# EAGLE board powerboard_v1a (EAGLE 7.2.0)
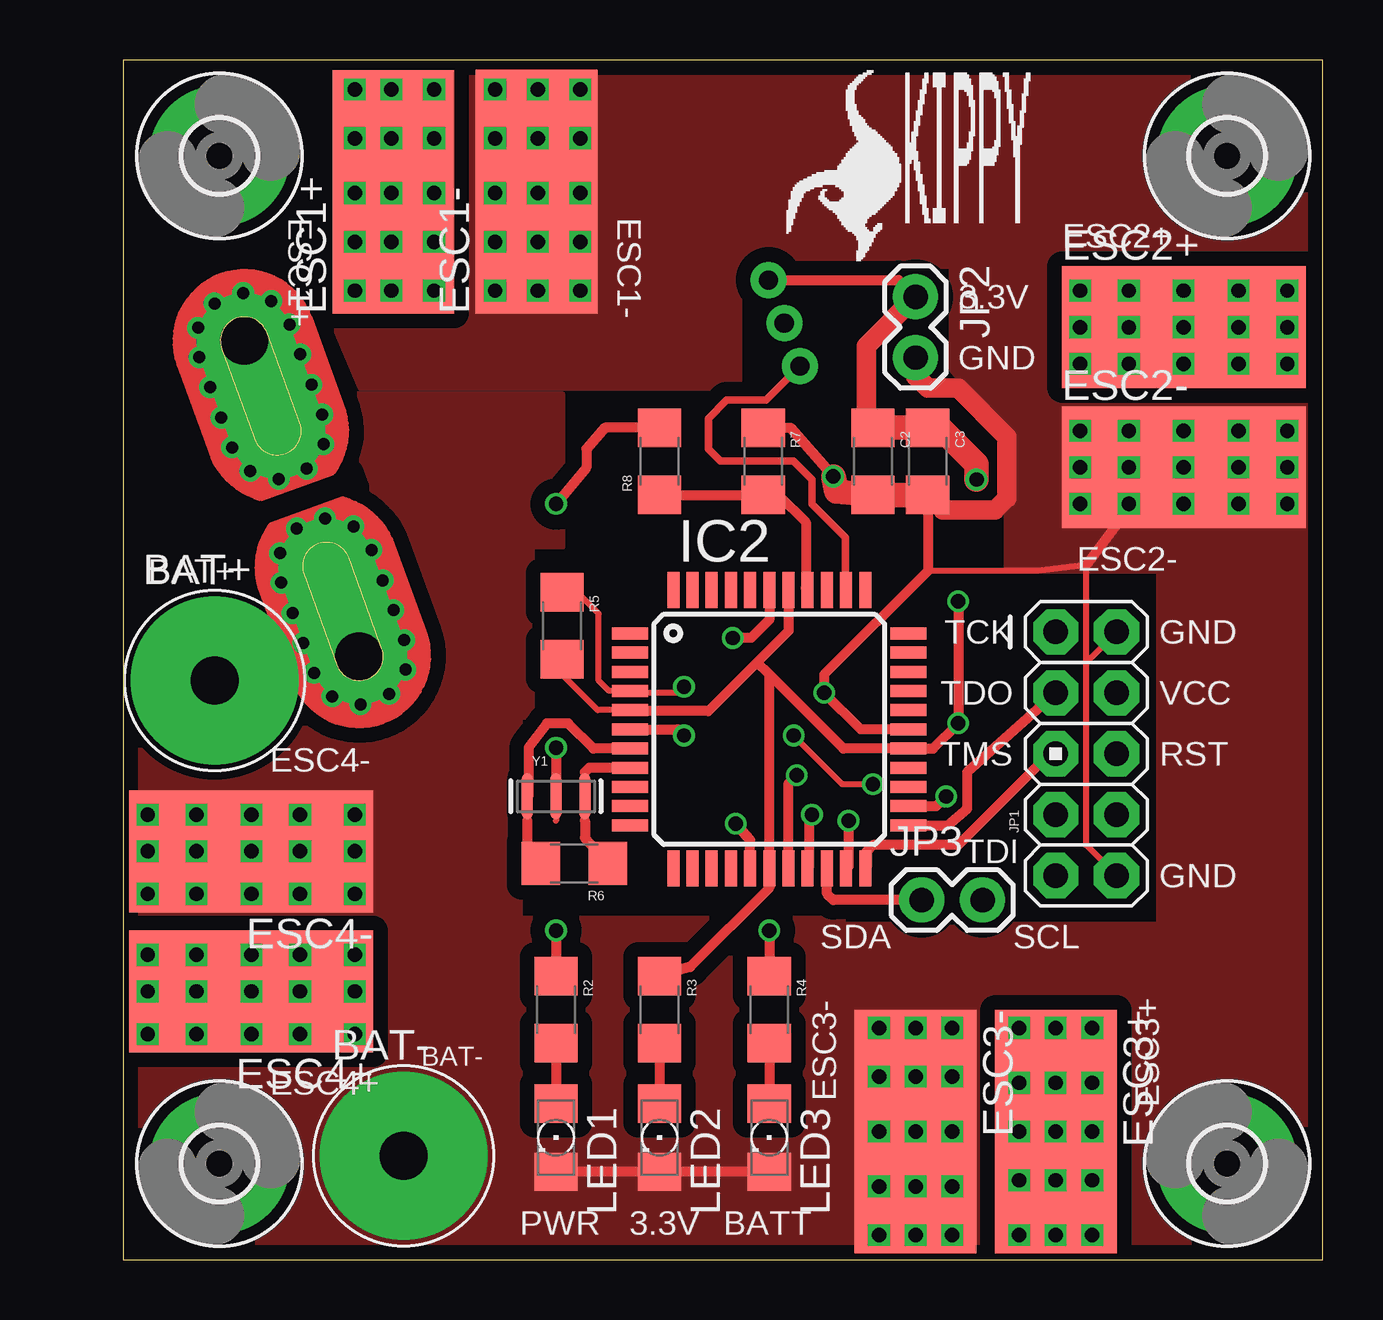
[diagram p0: board, top side]
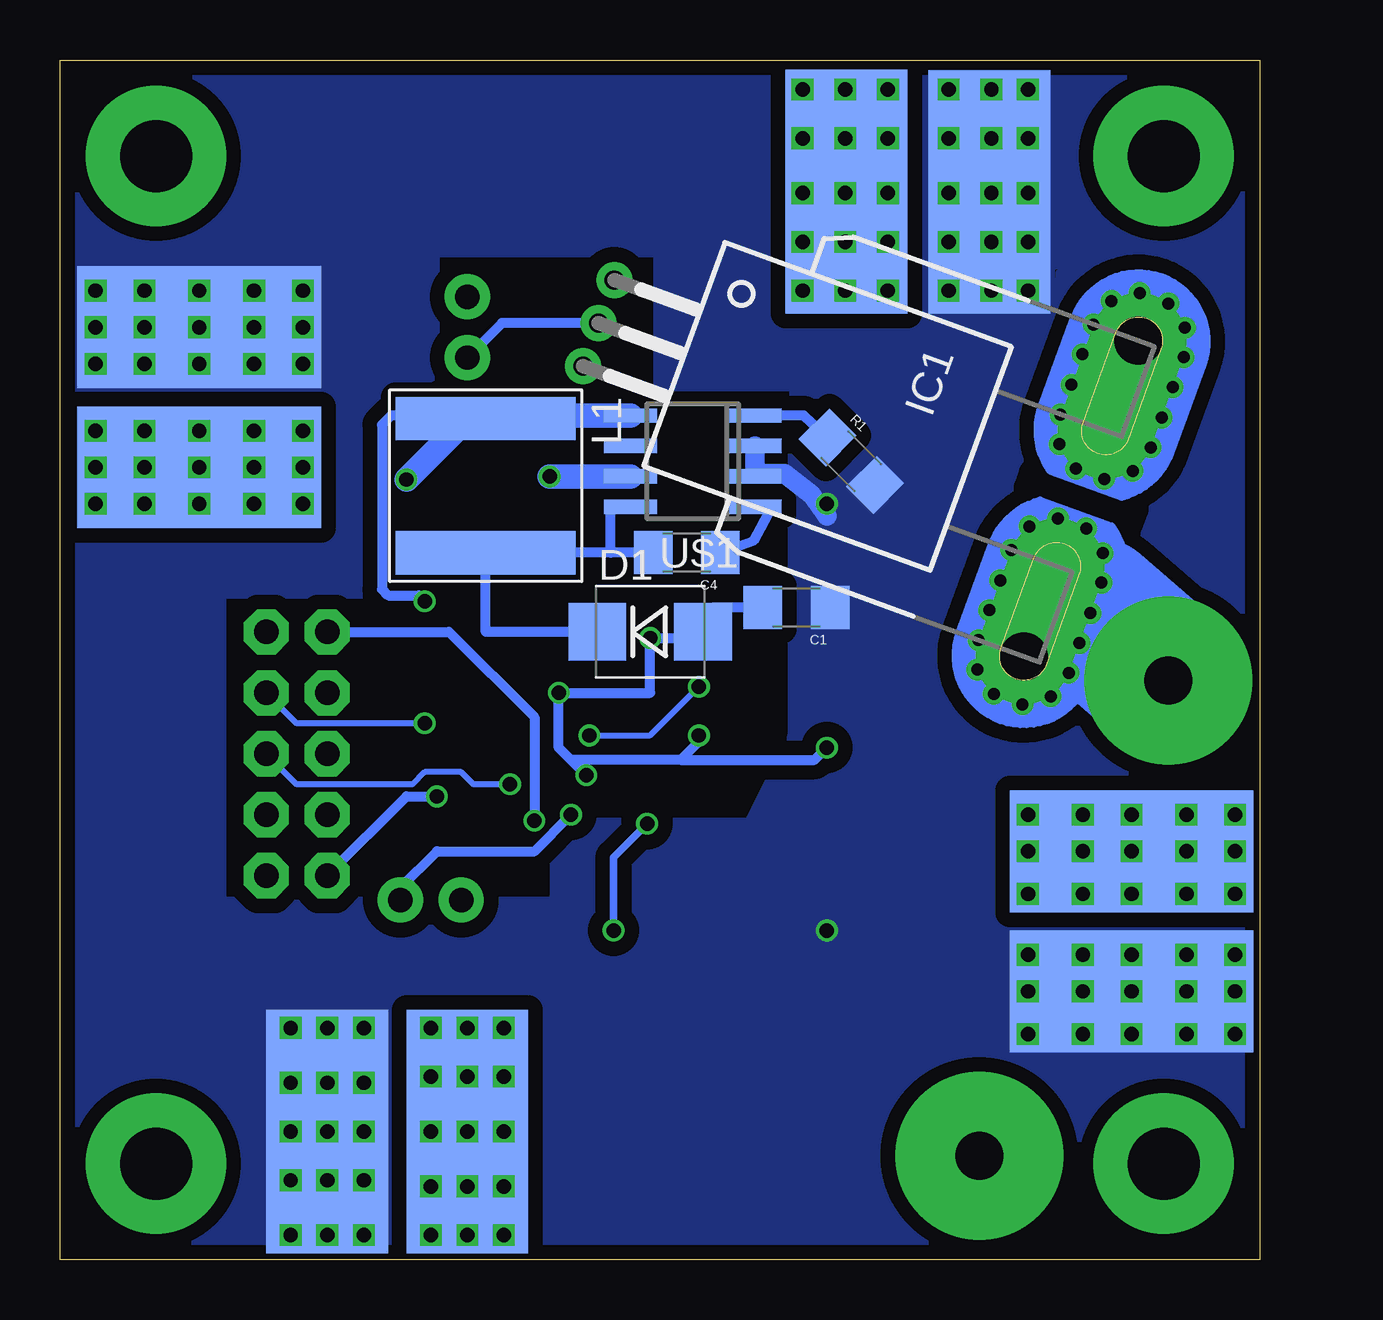
[diagram p1: board, bottom side, seen from below]

Size 50 x 50 mm. Coordinates in mm from the lower left corner, seen from the top.
Outline: 0,0 50,0 50,50 0,50 0,0
Copper layers (1*2*15*16): Top 0.035mm / dielectric 0.2mm / layer 2 0.0175mm / dielectric 1.1mm / layer 15 0.0175mm / dielectric 0.2mm / Bottom 0.035mm
Design rules "SeeedStudio_DRU_no_angle_20130527": minimum track width 6mil, minimum drill 12mil, track to track 6mil, track to pad 6mil, pad to pad 6mil, via to via 6mil, smd to smd 0mil, copper to edge 10mil, drill to drill 10mil, minimum pad ring 6mil, minimum via ring 6mil, stop-mask expansion 2mil, vias tented up to drill 25mil, thermal gap 10mil

## Footprints (pad centres in the part's own frame; a part is rotated, then mirrored left to right if it is on the bottom)
5/2 = drill 2 pad 7: P$1 0,0
1206 = smd 1.6 x 1.8: 1 -1.4,0; 2 1.4,0
SMB-DIODE = smd 2.4 x 2.4: A 2.2,0; C -2.2,0
SMD5.08-10.16 = smd 5.08 x 10.16 bottom: P$1 0,0 | smd 5.08 x 10.16: P$2 0,0
3,0-PAD = drill 3 pad 5.842: B3,0 0,0
CB-PFF = drill 0.8 pad 1.5: 1 -1.91,-21.4; 2 0,-21.4; 3 1.91,-21.4 | drill 2 pad 4 offset: IP+ 7,0; IP- -7,0 | drill 0.5 pad 0.9: IP+@2 8.89,0.635; IP+@3 8.89,-0.635; IP+@4 8.175,-1.625; IP+@5 7,-2; IP+@6 5.675,-2; IP+@7 4.35,-2; IP+@8 3,-2; IP+@9 1.825,-1.625; IP+@10 1.1,-0.625; IP+@11 1.1,0.625; IP+@12 1.825,1.625; IP+@13 3,2; IP+@14 4.35,2; IP+@15 5.675,2; IP+@16 7,2; IP+@17 8.175,1.625; IP-@2 -8.89,0.635; IP-@3 -8.89,-0.635; IP-@4 -8.175,-1.625; IP-@5 -7,-2; IP-@6 -5.675,-2; IP-@7 -4.325,-2; IP-@8 -3,-2; IP-@9 -1.825,-1.625; IP-@10 -1.1,-0.625; IP-@11 -1.1,0.625; IP-@12 -1.825,1.625; IP-@13 -3,2; IP-@14 -4.325,2; IP-@15 -5.675,2; IP-@16 -7,2; IP-@17 -8.175,1.625
TQFP44 = smd 1.5 x 0.5: 1 -5.8,4; 2 -5.8,3.2; 3 -5.8,2.4; 4 -5.8,1.6; 5 -5.8,0.8; 6 -5.8,0; 7 -5.8,-0.8; 8 -5.8,-1.6; 9 -5.8,-2.4; 10 -5.8,-3.2; 11 -5.8,-4; 23 5.8,-4; 24 5.8,-3.2; 25 5.8,-2.4; 26 5.8,-1.6; 27 5.8,-0.8; 28 5.8,0; 29 5.8,0.8; 30 5.8,1.6; 31 5.8,2.4; 32 5.8,3.2; 33 5.8,4 | smd 0.5 x 1.5: 12 -4,-5.8; 13 -3.2,-5.8; 14 -2.4,-5.8; 15 -1.6,-5.8; 16 -0.8,-5.8; 17 0,-5.8; 18 0.8,-5.8; 19 1.6,-5.8; 20 2.4,-5.8; 21 3.2,-5.8; 22 4,-5.8; 34 4,5.8; 35 3.2,5.8; 36 2.4,5.8; 37 1.6,5.8; 38 0.8,5.8; 39 0,5.8; 40 -0.8,5.8; 41 -1.6,5.8; 42 -2.4,5.8; 43 -3.2,5.8; 44 -4,5.8
AVR_ICSP = drill 1.016 pad 1.88 octagon: 1 -1.27,5.08; 2 1.27,5.08; 3 -1.27,2.54; 4 1.27,2.54; 5 -1.27,0; 6 1.27,0; 7 -1.27,-2.54; 8 1.27,-2.54; 9 -1.27,-5.08; 10 1.27,-5.08
1X02 = drill 1.016 pad 1.88: 1 0,0; 2 2.54,0
NRS8030 = smd 1.8 x 7.5: P$1 2.8,0; P$2 -2.8,0
LED_1206 = smd 1.6 x 1.803: A -1.422,0; C 1.422,0
SO8 = smd 0.6 x 2.2: 1 -1.905,-2.6; 2 -0.635,-2.6; 3 0.635,-2.6; 4 1.905,-2.6; 5 1.905,2.6; 6 0.635,2.6; 7 -0.635,2.6; 8 -1.905,2.6
RESONATOR-SMD = smd 0.45 x 1.905: 1 -1.2,0; 2 0,0; 3 1.2,0

## Placement (x,y rotation side)
BAT+  5/2  [5/2]  3.81,24.13 0 top
BAT-  5/2  [5/2]  11.68,4.32 0 top
C1  10µ  [1206]  19.3,27.18 180 bottom
C2  22µ/16V  [1206]  31.24,33.27 270 top
C3  22µ/16V  [1206]  33.53,33.27 270 top
C4  0.1µ  [1206]  23.88,29.46 180 bottom
D1  B330B  [SMB-DIODE]  25.4,26.16 0 bottom
ESC1+  SMD10  [SMD5.08-10.16]  11.25,44.5 0 top
ESC1-  SMD10  [SMD5.08-10.16]  17.23,44.5 0 top
ESC2+  SMD10  [SMD5.08-10.16]  44.2,38.86 270 top
ESC2-  SMD10  [SMD5.08-10.16]  44.2,33.02 270 top
ESC3+  SMD10  [SMD5.08-10.16]  38.86,5.33 180 top
ESC3-  SMD10  [SMD5.08-10.16]  33.02,5.33 180 top
ESC4+  SMD10  [SMD5.08-10.16]  5.33,11.18 90 top
ESC4-  SMD10  [SMD5.08-10.16]  5.33,17.02 90 top
H1  MOUNT-PAD-ROUND3.0  [3,0-PAD]  4,46 0 top
H2  MOUNT-PAD-ROUND3.0  [3,0-PAD]  46,46 0 top
H3  MOUNT-PAD-ROUND3.0  [3,0-PAD]  4,4 0 top
H4  MOUNT-PAD-ROUND3.0  [3,0-PAD]  46,4 90 top
IC1  ACS756LCB-100B-PFF-T  [CB-PFF]  7.44,31.71 250 bottom
IC2  ATMEGA644-A  [TQFP44]  26.92,22.1 0 top
JP1  JTAG_CONNPTH  [AVR_ICSP]  40.13,21.08 0 top
JP2  M02PTH  [1X02]  33.02,40.13 270 top
JP3  M02PTH  [1X02]  33.27,14.99 0 top
L1  NRS8030T100  [NRS8030]  32.26,32.26 270 bottom
LED1  RED  [LED_1206]  18.03,5.08 270 top
LED2  RED  [LED_1206]  22.35,5.08 270 top
LED3  RED  [LED_1206]  26.92,5.08 270 top
R1  100k  [1206]  17.02,33.27 315 bottom
R2  100k  [1206]  18.03,10.41 270 top
R3  100k  [1206]  22.35,10.41 270 top
R4  100k  [1206]  26.92,10.41 270 top
R5  10k  [1206]  18.29,26.42 270 top
R6  1M  [1206]  18.8,16.51 180 top
R7  10k  [1206]  26.67,33.27 270 top
R8  50k  [1206]  22.35,33.27 90 top
U$1  AD2302ARDZ-3.3  [SO8]  23.62,33.27 90 bottom
U$2  SKIPPYTXT-PLC-10MM  [SKIPPYTXT-PLC-10MM]  27.69,41.66 0 top
Y1  10MHZ  [RESONATOR-SMD]  18.03,19.3 0 top

## Library data of the parts
BAT+ BAT- ESC1+ ESC1- ESC2+ ESC2- ESC3+ ESC3- ESC4+ ESC4- JP1 = connectors
C1-C4 = SparkFun-Capacitors
D1 = SparkFun-DiscreteSemi; PROD_ID: DIO-09646
H1-H4 = holes
IC1 = allegro; MPN: ACS758LCB-100B-PFF-T; OC_FARNELL: 1718998; OC_NEWARK: 04R7132
IC2 = atmega; OC_FARNELL: unknown; OC_NEWARK: unknown
JP2 JP3 = SparkFun-Connectors
L1 = inductors
LED1-LED3 = eagle-ltspice; SPICEMODEL: NONE; SPICEPREFIX: D; SPICETYPE: diode
R1-R8 = SparkFun-Passives
U$1 = dcdcconv
U$2 = skippy-logo
Y1 = SparkFun-FreqCtrl; PROD_ID: XTAL-08895

## Nets
3.3V: C2.1 C3.1 IC1.1 IC2.5 IC2.17 IC2.27 IC2.38 JP1.4 JP2.1 L1.P$2 R3.1 R5.2 U$1.5
GND: BAT-.P$1 C1.2 C2.2 C3.2 D1.A ESC1-.P$1 ESC1-.P$2 ESC2-.P$1 ESC2-.P$2 ESC3-.P$1 ESC3-.P$2 ESC4-.P$1 ESC4-.P$2 IC1.2 IC2.6 IC2.18 IC2.28 IC2.39 JP1.2 JP1.10 JP2.2 LED1.C LED2.C LED3.C R7.1 U$1.7 Y1.2
I_VOUT: IC1.3 IC2.35
LO_BATT_LED: IC2.16 R4.1
N$1: BAT+.P$1 IC1.IP+ IC1.IP+@2 IC1.IP+@3 IC1.IP+@4 IC1.IP+@5 IC1.IP+@6 IC1.IP+@7 IC1.IP+@8 IC1.IP+@9 IC1.IP+@10 IC1.IP+@11 IC1.IP+@12 IC1.IP+@13 IC1.IP+@14 IC1.IP+@15 IC1.IP+@16 IC1.IP+@17
N$2: C4.2 D1.C L1.P$1 U$1.8
N$3: R1.1 U$1.4
N$4: LED1.A R2.2
N$5: C4.1 U$1.1
N$6: LED2.A R3.2
N$7: LED3.A R4.2
N$8: IC2.7 R6.2 Y1.1
N$9: IC2.8 R6.1 Y1.3
N$10: IC2.37 R7.2 R8.1
NSRST: IC2.4 JP1.6 R5.1
SCL: IC2.19 JP3.2
SDA: IC2.20 JP3.1
TCK: IC2.21 JP1.1
TDI: IC2.24 JP1.9
TDO: IC2.23 JP1.3
TMS: IC2.22 JP1.5
V_BATT: C1.1 ESC1+.P$1 ESC1+.P$2 ESC2+.P$1 ESC2+.P$2 ESC3+.P$1 ESC3+.P$2 ESC4+.P$1 ESC4+.P$2 IC1.IP- IC1.IP-@2 IC1.IP-@3 IC1.IP-@4 IC1.IP-@5 IC1.IP-@6 IC1.IP-@7 IC1.IP-@8 IC1.IP-@9 IC1.IP-@10 IC1.IP-@11 IC1.IP-@12 IC1.IP-@13 IC1.IP-@14 IC1.IP-@15 IC1.IP-@16 IC1.IP-@17 R1.2 R2.1 R8.2 U$1.2 U$1.3

## Tracks (layer width: path | path; a pad name or v marks a point on that pad's centre or on a via)
3.3V  (via drill 0.6)
  Top 0.254: IC2.5 19.77,22.9 18.29,24.38 R5.2
  Top 0.406: IC2.38 27.72,26.2 26.42,24.89 | 26.42,24.89 24.38,22.86 21.16,22.86 IC2.5 | 26.92,24.38 30.01,21.3 IC2.27 33.74,21.3 v34.8,22.35 v34.8,27.43 | 26.92,24.38 26.42,24.89 | 26.92,24.38 IC2.17 26.92,15.49 23.62,12.19 R3.1 | 31.11,34.54 C2.1 | IC1.1 32.32,40.83 JP2.1
  Top 0.813: C2.1 30.96,34.95 30.96,38.08 JP2.1
  Top 1.016: v35.56,32.51 35.56,33.15 34.04,34.67 33.28,34.67 C3.1 C2.1
  Bottom 0.254: v34.8,22.35 40.13,22.35 JP1.4
  Bottom 0.406: 32.26,35.18 L1.P$2 | U$1.5 36.2,35.18 36.58,34.8 36.58,27.94 36.32,27.69 35.05,27.69 v34.8,27.43
  Bottom 1.016: U$1.5 30.11,35.18 L1.P$2 33.01,35.06 v35.56,32.51
GND  (via drill 0.6)
  Top 0.254: JP1.10 40.13,17.27 40.13,24.89 | 40.13,24.89 JP1.2 | 40.13,24.89 40.13,28.96 38.1,28.7 33.53,28.7
  Top 0.305: ESC1-.P$2 17.23,45.42 17.27,45.47 16.76,45.47 16.51,45.21 | ESC1-.P$2 17.22,44.5 16.51,45.21 | 16.51,44.96 16.51,45.21 | v19.05,44.45 18.29,43.69 18.29,43.43 v17.27,44.45 ESC1-.P$2 | ESC1-.P$2 17.58,44.5 18.03,44.96 18.03,43.69 | ESC1-.P$2 17.23,44.15 v15.49,42.42
  Top 0.406: IC2.39 26.92,26.67 26.16,25.91 v25.4,25.91 | IC2.28 30.73,22.1 v29.21,23.62 29.21,24.38 33.53,28.7 C3.2 | IC2.18 27.72,19.85 v28.07,20.19 | LED3.C LED2.C LED1.C | R7.1 27.81,34.67 v29.59,32.64 | IC2.6 23.11,22.1 v23.37,21.84 | ESC2-.P$2 43.18,33.02 40.13,28.96 | v18.03,21.34 Y1.2
  Top 0.813: JP2.2 33.02,36.83 33.53,36.32 34.8,36.32 36.83,34.29 36.83,31.75 36.32,31.24 34.16,31.24 C3.2
  Top 1.016: C3.2 C2.2 29.72,32 v29.59,32.64
  Bottom 0.305: ESC1-.P$2 17.23,44.91 v19.05,46.74
  Bottom 0.406: v28.07,20.19 28.7,20.83 | 24.13,20.83 28.7,20.83 | 28.7,20.83 29.21,21.34 v29.21,23.62 25.4,23.62 v25.4,25.91 23.45,25.91 D1.A 22.82,27.18 C1.2 | v23.37,21.84 23.37,21.59 24.13,20.83 | 24.13,20.83 18.54,20.83 v18.03,21.34 | IC1.2 31.58,39.03 JP2.2
  Bottom 1.016: v29.59,32.64 U$1.7
  other vias: 15.49,48.77 19.05,48.77 17.27,48.77 17.27,46.74 15.49,46.74 15.49,44.45 19.05,42.42 17.27,42.42 15.49,40.39 17.27,40.39 19.05,40.39 39.88,34.54 39.88,31.5 39.88,33.02 41.91,33.02 41.91,34.54 44.2,34.54 44.2,33.02 41.91,31.5 44.2,31.5 46.48,31.5 48.51,31.5 48.51,33.02 46.48,33.02 46.48,34.54 48.51,34.54 31.5,9.65 33.02,9.65 34.54,9.65 34.54,7.62 33.02,7.62 31.5,7.62 31.5,5.33 33.02,5.33 34.54,5.33 34.54,3.05 34.54,1.02 33.02,1.02 33.02,3.05 31.5,3.05 31.5,1.02 1.02,18.54 1.02,17.02 1.02,15.24 3.05,15.24 3.05,17.02 3.05,18.54 5.33,18.54 5.33,17.02 5.33,15.24 7.37,15.24 7.37,17.02 7.37,18.54 9.65,18.54 9.65,17.02 9.65,15.24
  pour Top (isolate 0.61, no thermals): 0,49.78 49.78,49.78 49.78,0.25 0.25,0.25 0.25,40.89 7.62,40.89 9.65,36.07 18.29,36.07 18.29,29.72 17.02,29.72 17.02,22.61 16.51,22.61 16.51,14.22 29.97,14.22 29.97,13.97 43.18,13.97 43.18,28.7 36.83,28.7 36.83,34.29 34.54,37.08 34.54,41.4 25.65,41.4 25.65,36.32 9.91,36.32 7.87,41.15 0.25,41.15
I_VOUT
  Top 0.305: IC2.35 30.1,27.92 30.1,30.1 28.7,31.5 28.7,32.51 27.94,33.27 24.89,33.27 24.38,33.78 24.38,35.05 25.15,35.81 26.78,35.81 IC1.3
LO_BATT_LED  (via drill 0.6)
  Top 0.406: IC2.16 26.12,17.49 v25.53,18.16 | v26.92,13.72 R4.1
  Bottom 0.305: v25.53,18.16 26.92,16.76 v26.92,13.72
N$1
  Bottom 6.452: BAT+.P$1 IC1.IP+@14
N$2
  Bottom 0.406: D1.C 32.26,26.16 L1.P$1 27.05,29.46 | C4.2 27.05,29.46 | 27.05,29.46 27.05,31.37 U$1.8
N$3
  Bottom 0.406: R1.1 18.99,35.18 U$1.4
N$4
  Top 0.406: R2.2 LED1.A
N$5
  Bottom 0.406: C4.1 21.08,29.97 20.32,31.37 U$1.1
N$6
  Top 0.406: R3.2 LED2.A
N$7
  Top 0.406: R4.2 LED3.A
N$8
  Top 0.406: IC2.7 19.6,21.3 18.54,22.35 17.65,22.35 16.89,21.34 16.89,19.36 Y1.1 | 16.83,18.29 16.83,17.22 R6.2
N$9
  Top 0.406: IC2.8 19.41,20.5 19.23,20.32 | 19.23,18.29 19.23,17.58 R6.1
N$10
  Top 0.406: R8.1 R7.2 27.31,31.87 28.45,30.73 28.45,27.97 IC2.37
NSRST  (via drill 0.6)
  Top 0.254: R5.1 18.42,27.69 19.05,27.69 19.81,26.92 19.81,24.13 20.24,23.7 IC2.4 21.2,23.62 23.11,23.62 v23.37,23.88 | v31.24,19.81 29.97,19.81 v27.94,21.84
  Bottom 0.254: JP1.6 40.13,19.81 35.31,19.81 34.8,20.32 33.27,20.32 32.77,19.81 v31.24,19.81 | v27.94,21.84 25.4,21.84 v23.37,23.88
SCL  (via drill 0.6)
  Top 0.406: 28.57,16.25 IC2.19 28.57,16.35 28.57,18.41 v28.7,18.54
  Bottom 0.406: JP3.2 35.81,15.49 34.29,17.02 30.23,17.02 v28.7,18.54
SDA
  Top 0.406: JP3.1 29.59,14.99 29.34,15.24 29.34,16.29 IC2.20
TCK  (via drill 0.6)
  Top 0.406: v30.23,18.29 30.23,16.4 IC2.21
  Bottom 0.406: JP1.1 33.78,26.16 30.23,22.61 v30.23,18.29
TDI  (via drill 0.6)
  Top 0.406: IC2.24 33.88,18.9 v34.29,19.3
  Bottom 0.406: JP1.9 35.56,19.3 v34.29,19.3
TDO
  Top 0.406: IC2.23 34.35,18.1 35.18,18.8 35.18,20.32 JP1.3
TMS
  Top 0.406: JP1.5 38.61,21.08 34.8,17.27 31.24,17.27 30.99,17.02 30.99,16.36 IC2.22
V_BATT  (via drill 0.6)
  Top 0.305: v12.95,44.45 v11.18,44.45 v11.18,46.74 | ESC1+.P$2 11.25,46.66 v11.18,46.74 | v11.18,46.74 11.18,46.23 v12.95,44.45 | v12.95,44.45 12.7,44.45 11.68,43.43 10.67,43.43 v9.65,42.42
  Top 0.406: R8.2 20.07,34.67 19.3,33.78 19.3,33.02 v18.03,31.5 | v18.03,13.72 R2.1
  Bottom 0.305: v11.18,46.74 v12.95,46.74 v12.95,44.45 v11.18,44.45 v11.18,46.74 | v11.18,46.74 10.41,46.74 9.14,45.47
  Bottom 0.406: U$1.3 U$1.2 | ESC1+.P$2 9.45,44.5 | v37.34,9.65 37.08,9.65 | v18.03,31.5 18.67,31.88
  Bottom 0.813: U$1.3 21.02,32.83 21.08,32.77 19.81,32.77 18.67,31.88 18.03,30.99
  other vias: 38.86,5.33 40.39,9.65 40.39,1.02 37.34,1.02 40.39,7.37 37.34,7.37 40.39,5.33 40.39,3.3 37.34,3.3 37.34,5.33 38.86,7.37 38.86,9.65 38.86,3.3 38.86,1.02 9.65,12.7 9.65,9.4 9.65,11.18 5.33,12.7 5.33,11.18 5.33,9.4 7.37,9.4 7.37,11.18 7.37,12.7 1.02,12.7 1.02,9.4 1.02,11.18 3.05,11.18 3.05,9.4 3.05,12.7 39.88,40.39 39.88,37.34 39.88,38.86 41.91,38.86 41.91,40.39 41.91,37.34 44.2,37.34 44.2,38.86 44.2,40.39 46.48,40.39 46.48,38.86 46.48,37.34 48.51,37.34 48.51,38.86 48.51,40.39 9.65,48.77 11.18,48.77 12.95,48.77 9.65,46.74 9.65,44.45 12.95,42.42 11.18,42.42 11.18,40.39 12.95,40.39 9.65,40.39
  pour Bottom (isolate 0.61, no thermals): 0.25,49.78 49.78,49.78 49.78,0.25 0.25,0.25 0.25,41.15 8.38,41.15 8.64,36.07 19.56,36.07 19.56,21.84 21.34,18.29 29.46,18.29 29.46,14.99 43.18,14.99 43.18,27.69 37.08,27.69 37.08,35.31 34.29,36.83 34.29,41.91 25.15,41.91 25.15,36.32 8.64,36.32 8.64,41.4 0.25,41.4

## Text on the board
tPlace: ESC1+ | ESC1- | ESC2+ | 3.3V | GND | ESC2- | BAT+ | TCK | GND | TDO | VCC | TMS | RST | ESC4- | TDI | GND | SDA | SCL | BAT- | ESC4+ | ESC3- | ESC3+ | BATT | PWR | 3.3V